# Altium PCB dv_analog_6_ch.PcbDoc (part 1 of 2)
Units mm, origin at the board's own origin, x right, y up, seen from the top; angles counter-clockwise.
Board outline 86.22 x 62.2 mm, 4 copper layers (Top Layer, GND, power, Bottom Layer), stack 1.781 mm thick; 215 components, 117 nets, 545 pads, 83 vias.
Unrouted connection lines stored in the file: 307.
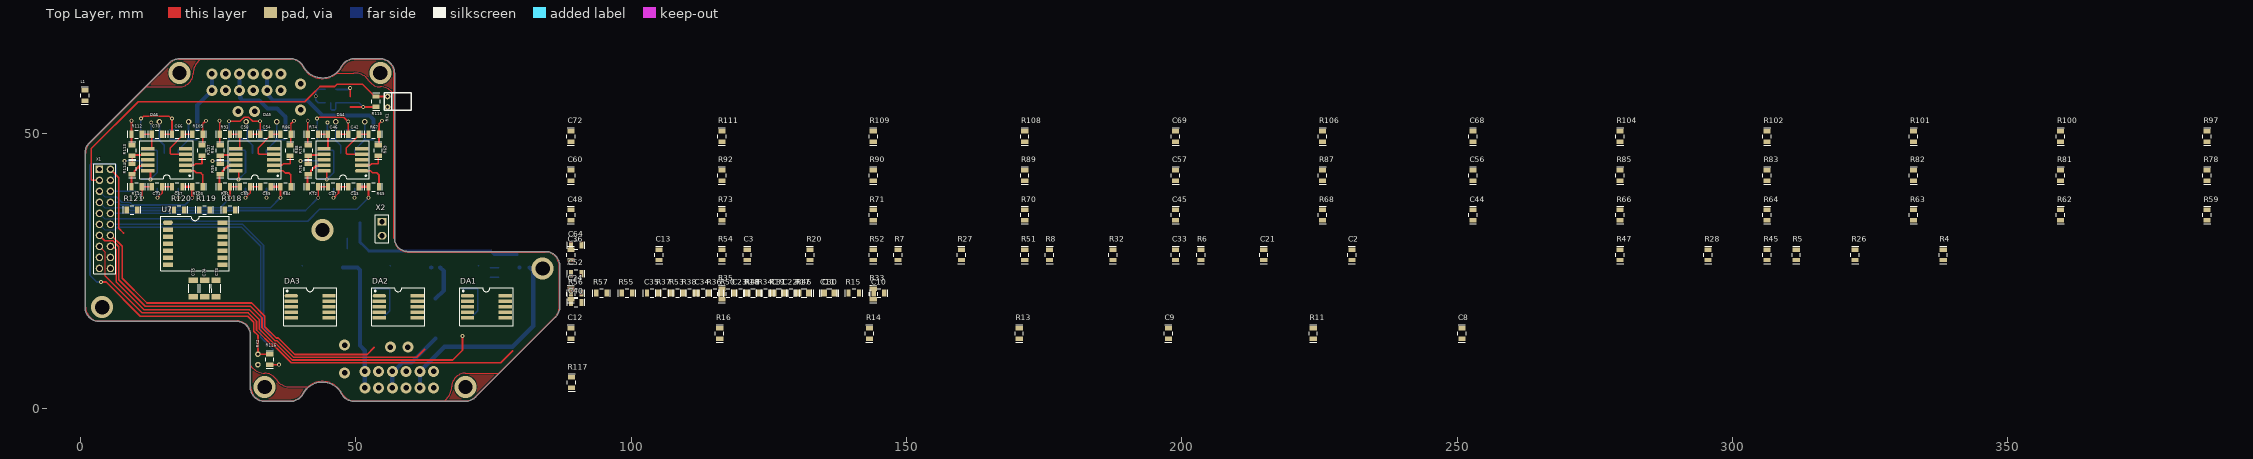
[diagram p0: Top Layer view]
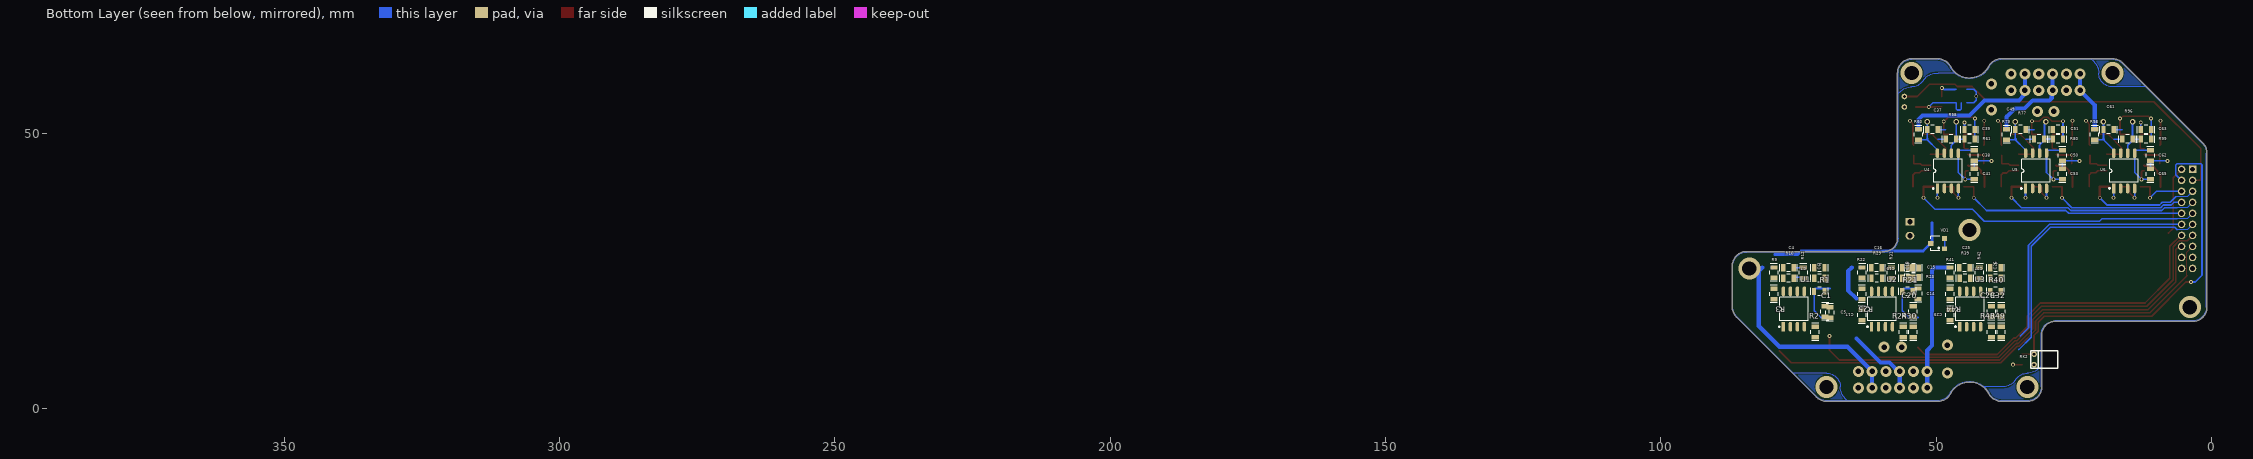
[diagram p1: Bottom Layer view, seen from below]
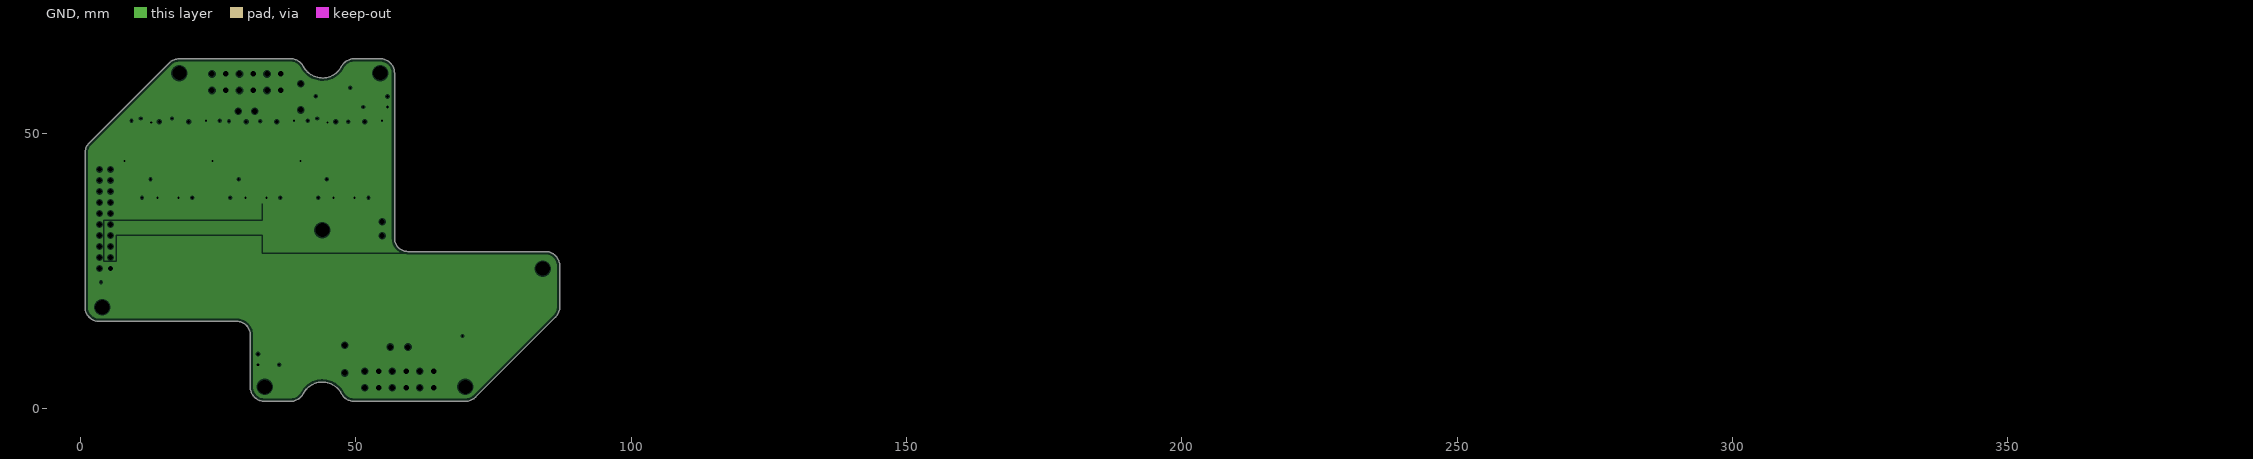
[diagram p2: GND, clearances drawn from the general rule]
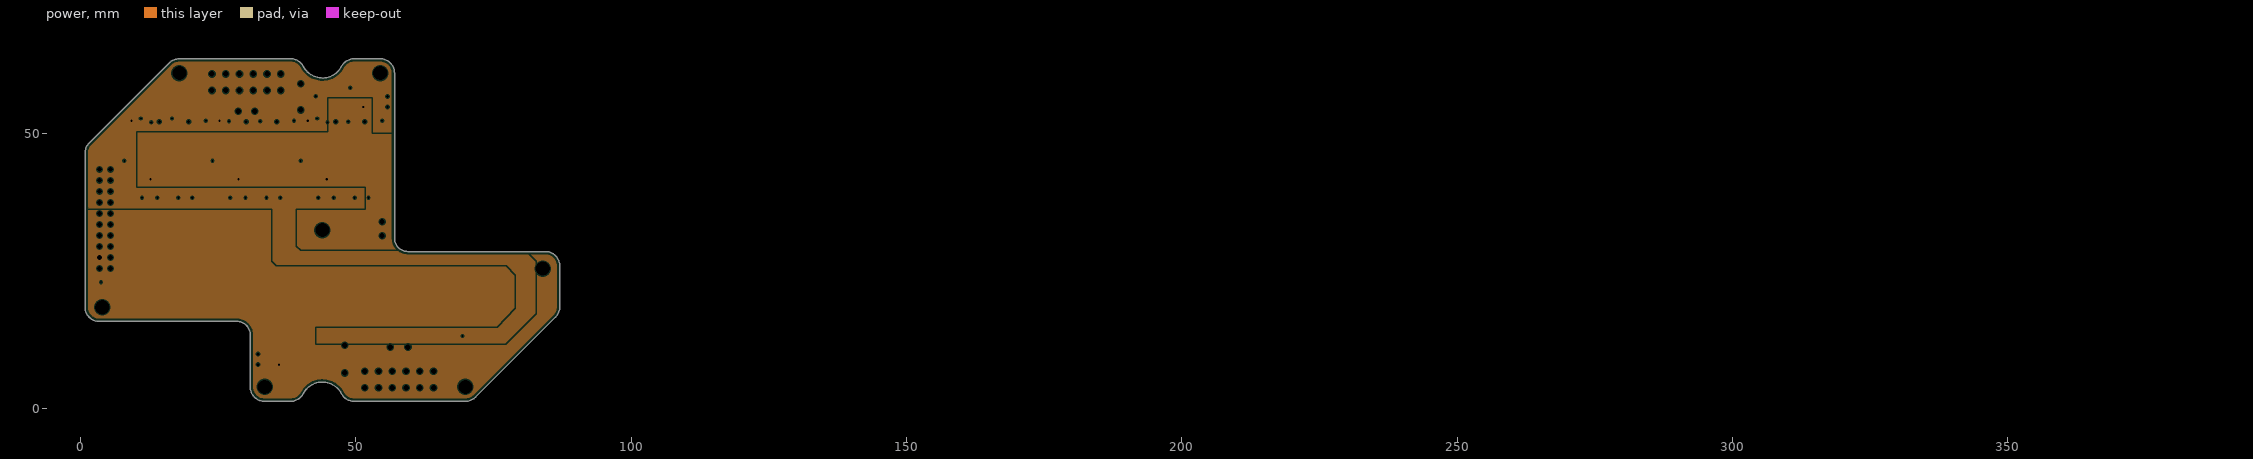
[diagram p3: power, clearances drawn from the general rule]

## Layer stack, top to bottom
Top Solder: solder mask 0.0254, SM-001, Dk 4
Top Layer: signal copper 0.035
Dielectric 2: prepreg 0.0711, PP-006, Dk 4.1
GND: plane copper 0.035, net GNDA
Dielectric 1: core 1.4986, Core-043, Dk 4.3
power: plane copper 0.035, net (Multiple Nets)
Dielectric 3: prepreg 0.0711, PP-006, Dk 4.1
Bottom Layer: signal copper 0.035
Bottom Solder: solder mask 0.0254, SM-001, Dk 4

## Board outline
3.451,15.847 28.451,15.847 cw(c28.451,13.447) 30.851,13.447 30.851,3.947 ccw(c33.451,3.947) 33.451,1.347 38.185,1.347 ccw(c38.185,3.947) 38.694,1.397 ccw(c38.2,3.95) 40.507,2.75 cw(c43.966,0.95) 43.219,4.777 cw(c43.951,0.947) 47.411,2.748 cw(c47.392,2.738) 47.411,2.747 ccw(c49.718,3.947) 49.718,1.347 69.916,1.347 ccw(c69.916,3.947) 70.426,1.397 ccw(c69.931,3.95) 71.769,2.11 ccw(c71.442,2.439) 71.77,2.111 86.305,16.647 ccw(c86.263,16.689) 86.306,16.648 ccw(c84.466,18.486) 87.067,18.486 ccw(c86.966,18.486) 87.052,18.538 87.052,25.947 ccw(c84.451,25.947) 84.451,28.547 59.451,28.547 cw(c59.451,30.947) 57.052,30.947 ccw(c56.951,30.947) 57.052,30.948 57.052,60.947 ccw(c54.451,60.947) 54.452,63.547 ccw(c54.452,62.897) 54.451,63.547 cw(c54.452,63.527) 54.452,63.547 54.451,63.547 49.718,63.547 ccw(c49.718,60.947) 47.411,62.147 ccw(c47.516,62.093) 47.411,62.147 ccw(c47.276,62.217) 47.411,62.147 cw(c43.951,63.947) 44.728,60.125 cw(c43.966,63.95) 40.507,62.15 ccw(c38.2,60.95) 38.202,63.55 ccw(c38.201,62.9) 38.2,63.55 cw(c38.201,63.485) 38.202,63.55 38.2,63.55 18.002,63.55 ccw(c18.002,63.48) 18,63.55 cw(c18.001,63.446) 18.002,63.55 18,63.55 ccw(c18.002,60.95) 17.493,63.5 ccw(c17.987,60.947) 16.148,62.786 1.613,48.25 ccw(c3.451,46.412) 0.851,46.412 ccw(c0.951,46.412) 0.851,46.411 0.851,18.447 ccw(c3.451,18.447)

## Design rules (kind name [scope] priority, off if disabled: settings)
Clearance [InNamedPolygon('NONET_L01_P004')] p1: gap=0.254 ignorepadtopadclearanceinfootprint=FALSE except(0: Arc-Hole Track-Hole SMDPad-Hole THPad-Hole Via-Hole Fill-Hole Poly-Hole Region-Hole Text-Hole)
Clearance "Clearance ALL" [All] p2: gap=0.2 ignorepadtopadclearanceinfootprint=TRUE
ComponentClearance [All] p1: gap=0.051 collisioncheckmode=3 verticalgap=0.051 showdistances=FALSE
DiffPairsRouting [InDifferentialPairClass('Diff Class')] p1: maxlimit=0.35 minlimit=0.25 mostfreqgap=0.25 toplayer_minwidth=0.25 toplayer_maxwidth=0.4 toplayer_prefwidth=0.3 bottomlayer_minwidth=0.25 bottomlayer_maxwidth=0.4 bottomlayer_prefwidth=0.3 maxuncoupledlength=12.7
HoleSize [All] p1: absolutevalues=TRUE maxlimit=3 minlimit=0.025 maxpercent=80.000 minpercent=20.000
MatchedLengths [InDifferentialPairClass('Diff Class')] p1: tolerance=0.5 checknetsindiffpair=TRUE checkdiffpairvsdiffpair=FALSE checkxsignals=FALSE checkothers=FALSE
PlaneClearance [All] p1: clearance=0.2
PlaneConnect [All] p1: planeconnectstyle=Relief reliefexpansion=0.508 reliefentries=4 reliefconductorwidth=0.4 reliefairgap=0.254
PolygonConnect [All] p1: connectstyle=Relief reliefconductorwidth=0.4 reliefentries=4 polygonreliefangle="90 Angle" airgapwidth=0.2
RoomDefinition dv_analog_main [InComponentClass('dv_analog_main')] p1: confinementstyle=ConfineIn formatcopy=TRUE lockcomponents=FALSE outline 88.1,3.1 109.6,3.1 109.6,10.6 88.1,10.6
RoomDefinition dv_analog_interface_ch6 [InComponentClass('dv_analog_interface_ch6')] p2: confinementstyle=ConfineIn formatcopy=TRUE lockcomponents=FALSE outline 7.7,37.5 23.7,37.5 23.7,53.1 7.7,53.1
RoomDefinition dv_analog_interface_ch1 [InComponentClass('dv_analog_interface_ch1')] p3: confinementstyle=ConfineIn formatcopy=TRUE lockcomponents=FALSE outline 65.9,12.4 81.9,12.4 81.9,28 65.9,28
RoomDefinition dv_analog_interface_ch4 [InComponentClass('dv_analog_interface_ch4')] p4: confinementstyle=ConfineIn formatcopy=TRUE lockcomponents=FALSE outline 39.7,37.5 55.7,37.5 55.7,53.1 39.7,53.1
RoomDefinition dv_analog_interface_ch5 [InComponentClass('dv_analog_interface_ch5')] p5: confinementstyle=ConfineIn formatcopy=TRUE lockcomponents=FALSE outline 23.7,37.5 39.7,37.5 39.7,53.1 23.7,53.1
RoomDefinition dv_analog_interface_ch3 [InComponentClass('dv_analog_interface_ch3')] p6: confinementstyle=ConfineIn formatcopy=TRUE lockcomponents=FALSE outline 33.9,12.4 49.9,12.4 49.9,28 33.9,28
RoomDefinition dv_analog_interface_ch2 [InComponentClass('dv_analog_interface_ch2')] p7: confinementstyle=ConfineIn formatcopy=TRUE lockcomponents=FALSE outline 49.9,12.4 65.9,12.4 65.9,28 49.9,28
RoutingVias [All] p1: holewidth=0.3 width=0.6 viastyle="Through Hole" minholewidth=0.3 minwidth=0.6 maxholewidth=1 maxwidth=3
SolderMaskExpansion [All] p1: expansion=0.102 istentingtop=FALSE
Width [All] p1: maxlimit=1 minlimit=0.2 preferedwidth=0.2 minimp=50.000000 maximp=50.000000 favimp=50.000000
25 further rules are at their usual default settings.

## Classes and differential pairs
channel class dv_analog_interface_ch: "All Components" "Bottom Side Components" dv_analog_interface_ch1 dv_analog_interface_ch2 dv_analog_interface_ch3 dv_analog_interface_ch4 dv_analog_interface_ch5 dv_analog_interface_ch6 "Inside Board Components" "Outside Board Components" "Top Side Components"
net class input[1..6]: input1 input2 input3 input4 input5 input6
net class data_2[1..6]: data_21 data_22 data_23 data_24 data_25 data_26
net class data_1[1..6]: data_11 data_12 data_13 data_14 data_15 data_16
component class dv_analog_main: C73 C74 C75 L1 R115 R116 R117 R118 R119 R120 R121 RK1 RK2 U7 VD1 X1 X2 X?
component class dv_analog_interface_ch5: C49 C50 C51 C52 C53 C54 C55 C56 C57 C58 C59 C60 C?_dv_analog_interface_ch6 DA5 DA?_dv_analog_interface_ch6 R77 R78 R79 R80 R81 R82 R83 R84 R85 R86 R87 R88 R89 R90 R91 R92 R93 R94 R95 R?_dv_analog_interface_ch6 U5
component class dv_analog_interface_ch4: C37 C38 C39 C40 C41 C42 C43 C44 C45 C46 C47 C48 C?_dv_analog_interface_ch5 DA4 DA?_dv_analog_interface_ch5 R58 R59 R60 R61 R62 R63 R64 R65 R66 R67 R68 R69 R70 R71 R72 R73 R74 R75 R76 R?_dv_analog_interface_ch5 U4
component class dv_analog_interface_ch3: C25 C26 C27 C28 C29 C30 C31 C32 C33 C34 C35 C36 DA3 R39 R40 R41 R42 R43 R44 R45 R46 R47 R48 R49 R50 R51 R52 R53 R54 R55 R56 R57 U3
component class dv_analog_interface_ch6: C61 C62 C63 C64 C65 C66 C67 C68 C69 C70 C71 C72 DA6 R96 R97 R98 R99 R100 R101 R102 R103 R104 R105 R106 R107 R108 R109 R110 R111 R112 R113 R114 U6
component class dv_analog_interface_ch2: C13 C14 C15 C16 C17 C18 C19 C20 C21 C22 C23 C24 DA2 R20 R21 R22 R23 R24 R25 R26 R27 R28 R29 R30 R31 R32 R33 R34 R35 R36 R37 R38 U2
component class dv_analog_interface_ch1: C1 C2 C3 C4 C5 C6 C7 C8 C9 C10 C11 C12 DA1 R1 R2 R3 R4 R5 R6 R7 R8 R9 R10 R11 R12 R13 R14 R15 R16 R17 R18 R19 U1

## Components (designator, comment, footprint, x,y, rotation, side; value= is the part's Value field where it differs from the comment)
C1 "K10-79" SMD_C0805 70.2,18.6 r270 bottom value=2.2нФ
C2 "K10-79" SMD_C0805 230.9,27 r90 top value="10 мкФ"
C3 "K10-79" SMD_C0805 121.1,27 r90 top value=150пФ
C4 "K10-79" SMD_C0805 77.8,25.6 r180 bottom value="10 мкФ" (schematic designator C15)
C5 "K10-79" SMD_C0805 69.312,18.454 r270 bottom value="10 мкФ" (schematic designator C4)
C6 "K10-79" SMD_C0805 70.3,23.7 r0 bottom value="0.1 мкФ" (schematic designator C5)
C7 "K10-79" SMD_C0805 70.3,25.6 r0 bottom value="1 нФ" (schematic designator C6)
C8 "K10-79" SMD_C0805 250.899,12.7 r90 top value="10 мкФ" (schematic designator C7)
C9 "K10-79" SMD_C0805 197.6,12.7 r90 top value="360 пФ" (schematic designator C8)
C10 "K10-79" SMD_C0805 144.1,21 r0 top value="0,1 мкФ" (schematic designator C9)
C11 "K10-79" SMD_C0805 134.9,21 r0 top value="1 нФ" (schematic designator C10)
C12 "K10-79" SMD_C0805 89.1,12.7 r90 top value="10 пФ" (schematic designator C11)
C13 "K10-79" SMD_C0805 105.1,27 r90 top value=2.2нФ (schematic designator C1)
C14 "K10-79" SMD_C0805 53.312,19.925 r90 bottom value="10 мкФ" (schematic designator C2)
C15 "K10-79" SMD_C0805 55.09,25.575 r180 bottom value=150пФ (schematic designator C3)
C16 "K10-79" SMD_C0805 61.8,25.6 r180 bottom value="10 мкФ" (schematic designator C15)
C17 "K10-79" SMD_C0805 63.5,16.1 r90 bottom value="10 мкФ" (schematic designator C4)
C18 "K10-79" SMD_C0805 54.3,23.7 r0 bottom value="0.1 мкФ" (schematic designator C5)
C19 "K10-79" SMD_C0805 54.3,25.6 r0 bottom value="1 нФ" (schematic designator C6)
C20 "K10-79" SMD_C0805 54.2,18.6 r270 bottom value="10 мкФ" (schematic designator C7)
C21 "K10-79" SMD_C0805 214.9,27 r90 top value="360 пФ" (schematic designator C8)
C22 "K10-79" SMD_C0805 128.1,21 r0 top value="0,1 мкФ" (schematic designator C9)
C23 "K10-79" SMD_C0805 118.9,21 r0 top value="1 нФ" (schematic designator C10)
C24 "K10-79" SMD_C0805 89.1,19.9 r90 top value="10 пФ" (schematic designator C11)
C25 "K10-79" SMD_C0805 45.8,25.6 r180 bottom value=2.2нФ (schematic designator C1)
C26 "K10-79" SMD_C0805 38.3,23.7 r0 bottom value="10 мкФ" (schematic designator C2)
C27 "K10-79" SMD_C0805 38.3,25.6 r0 bottom value=150пФ (schematic designator C3)
C28 "K10-79" SMD_C0805 40,16.7 r90 bottom value="10 мкФ" (schematic designator C15)
C29 "K10-79" SMD_C0805 47.5,16.1 r90 bottom value="10 мкФ" (schematic designator C4)
C30 "K10-79" SMD_C0805 135.2,21 r0 top value="0.1 мкФ" (schematic designator C5)
C31 "K10-79" SMD_C0805 126,21 r0 top value="1 нФ" (schematic designator C6)
C32 "K10-79" SMD_C0805 38.2,18.6 r270 bottom value="10 мкФ" (schematic designator C7)
C33 "K10-79" SMD_C0805 198.9,27 r90 top value="360 пФ" (schematic designator C8)
C34 "K10-79" SMD_C0805 112.1,21 r0 top value="0,1 мкФ" (schematic designator C9)
C35 "K10-79" SMD_C0805 102.9,21 r0 top value="1 нФ" (schematic designator C10)
C36 "K10-79" SMD_C0805 89.1,27 r90 top value="10 пФ" (schematic designator C11)
C37 "K10-79" SMD_C0805 51.643,50.675 r180 bottom value=2.2нФ (schematic designator C1)
C38 "K10-79" SMD_C0805 43.112,45.025 r90 bottom value="10 мкФ" (schematic designator C2)
C39 "K10-79" SMD_C0805 44.89,50.675 r180 bottom value=150пФ (schematic designator C3)
C40 "K10-79" SMD_C0805 89.1,19.3 r0 top value="10 мкФ" (schematic designator C15)
C41 "K10-79" SMD_C0805 43.112,43.554 r270 bottom value="10 мкФ" (schematic designator C4)
C42 "K10-79" SMD_C0805 50.548,49.85 r180 top value="0.1 мкФ" (schematic designator C5)
C43 "K10-79" SMD_C0805 48.643,40.297 r0 top value="1 нФ" (schematic designator C6)
C44 "K10-79" SMD_C0805 252.899,34.2 r90 top value="10 мкФ" (schematic designator C7)
C45 "K10-79" SMD_C0805 198.9,34.2 r90 top value="360 пФ" (schematic designator C8)
C46 "K10-79" SMD_C0805 44.964,49.85 r0 top value="0,1 мкФ" (schematic designator C9)
C47 "K10-79" SMD_C0805 46.869,40.297 r180 top value="1 нФ" (schematic designator C10)
C48 "K10-79" SMD_C0805 89.1,34.2 r90 top value="10 пФ" (schematic designator C11)
C49 "K10-79" SMD_C0805 35.643,50.675 r180 bottom value=2.2нФ (schematic designator C1)
C50 "K10-79" SMD_C0805 27.112,45.025 r90 bottom value="10 мкФ" (schematic designator C2)
C51 "K10-79" SMD_C0805 28.89,50.675 r180 bottom value=150пФ (schematic designator C3)
C52 "K10-79" SMD_C0805 89.1,24.5 r0 top value="10 мкФ" (schematic designator C15)
C53 "K10-79" SMD_C0805 27.112,43.554 r270 bottom value="10 мкФ" (schematic designator C4)
C54 "K10-79" SMD_C0805 34.548,49.85 r180 top value="0.1 мкФ" (schematic designator C5)
C55 "K10-79" SMD_C0805 32.643,40.297 r0 top value="1 нФ" (schematic designator C6)
C56 "K10-79" SMD_C0805 252.899,41.4 r90 top value="10 мкФ" (schematic designator C7)
C57 "K10-79" SMD_C0805 198.9,41.4 r90 top value="360 пФ" (schematic designator C8)
C58 "K10-79" SMD_C0805 28.964,49.85 r0 top value="0,1 мкФ" (schematic designator C9)
C59 "K10-79" SMD_C0805 30.869,40.297 r180 top value="1 нФ" (schematic designator C10)
C60 "K10-79" SMD_C0805 89.1,41.4 r90 top value="10 пФ" (schematic designator C11)
C61 "K10-79" SMD_C0805 19.643,50.675 r180 bottom value=2.2нФ (schematic designator C1)
C62 "K10-79" SMD_C0805 11.112,45.025 r90 bottom value="10 мкФ" (schematic designator C2)
C63 "K10-79" SMD_C0805 12.89,50.675 r180 bottom value=150пФ (schematic designator C3)
C64 "K10-79" SMD_C0805 89.1,29.7 r0 top value="10 мкФ" (schematic designator C15)
C65 "K10-79" SMD_C0805 11.112,43.554 r270 bottom value="10 мкФ" (schematic designator C4)
C66 "K10-79" SMD_C0805 18.548,49.85 r180 top value="0.1 мкФ" (schematic designator C5)
C67 "K10-79" SMD_C0805 16.643,40.297 r0 top value="1 нФ" (schematic designator C6)
C68 "K10-79" SMD_C0805 252.899,48.5 r90 top value="10 мкФ" (schematic designator C7)
C69 "K10-79" SMD_C0805 198.9,48.5 r90 top value="360 пФ" (schematic designator C8)
C70 "K10-79" SMD_C0805 12.964,49.85 r0 top value="0,1 мкФ" (schematic designator C9)
C71 "K10-79" SMD_C0805 14.869,40.297 r180 top value="1 нФ" (schematic designator C10)
C72 "K10-79" SMD_C0805 89.1,48.5 r90 top value="10 пФ" (schematic designator C11)
C73 "K10-79" SMD_C1206 24.632,23.325 r270 top value=22мкФ (schematic designator C12)
C74 "K10-79" SMD_C1206 22.57,23.325 r270 top value=22мкФ (schematic designator C13)
C75 "K10-79" SMD_C1206 20.508,23.325 r270 top value=22мкФ (schematic designator C14)
DA1 "1487UD2U" HO2.8-1B 70.3,20.5 r0 top
DA2 "1487UD2U" HO2.8-1B 54.3,20.5 r0 top (schematic designator DA1)
DA3 "1487UD2U" HO2.8-1B 38.3,20.5 r0 top (schematic designator DA1)
DA4 "1487UD2U" HO2.8-1B 51.1,43.2 r180 top (schematic designator DA1)
DA5 "1487UD2U" HO2.8-1B 35.1,43.2 r180 top (schematic designator DA1)
DA6 "1487UD2U" HO2.8-1B 19.1,43.2 r180 top (schematic designator DA1)
L1 "Inductor" SMD_0805 0.837,57.8 r270 top value=1мкГн
R1 "OSM R1-12" SMD_0805 72.205,21.3 r180 bottom value=10M
R2 "OSM R1-12" SMD_0805 72,13 r90 bottom value=330
R3 "OSM R1-12" SMD_0805 79.5,19.9 r90 bottom value=10k
R4 "OSM R1-12" SMD_0805 338.299,27 r90 top value=51k
R5 "OSM R1-12" SMD_0805 311.599,27 r90 top value=330
R6 "OSM R1-12" SMD_0805 203.5,27 r90 top value=27
R7 "OSM R1-12" SMD_0805 148.5,27 r90 top value=10k
R8 "OSM R1-12" SMD_0805 176,27 r90 top value=13k
R9 "OSM R1-12" SMD_0805 79.495,25.65 r270 bottom value=51k
R10 "OSM R1-12" SMD_0805 77.77,23.7 r180 bottom value=200к
R11 "OSM R1-12" SMD_0805 223.9,12.7 r90 top value=27
R12 "OSM R1-12" SMD_0805 74.154,23.745 r90 bottom value=10k
R13 "OSM R1-12" SMD_0805 170.5,12.7 r90 top value=110k
R14 "OSM R1-12" SMD_0805 143.3,12.7 r90 top value=10k
R15 "OSM R1-12" SMD_0805 139.5,21 r0 top value=13k
R16 "OSM R1-12" SMD_0805 116.1,12.7 r90 top value=51k
R17 "OSM R1-12" SMD_0805 130.3,21 r0 top value=200к
R18 "OSM R1-12" SMD_0805 121.1,21 r0 top value=330
R19 "OSM R1-12" SMD_0805 125.7,21 r0 top value=1M
R20 "OSM R1-12" SMD_0805 132.5,27 r90 top value=10M (schematic designator R1)
R21 "OSM R1-12" SMD_0805 56.205,21.3 r180 bottom value=330 (schematic designator R2)
R22 "OSM R1-12" SMD_0805 63.495,25.65 r270 bottom value=10k (schematic designator R3)
R23 "OSM R1-12" SMD_0805 55.09,23.85 r180 bottom value=51k (schematic designator R4)
R24 "OSM R1-12" SMD_0805 56,13 r90 bottom value=330 (schematic designator R5)
R25 "OSM R1-12" SMD_0805 63.5,19.9 r90 bottom value=27 (schematic designator R6)
R26 "OSM R1-12" SMD_0805 322.299,27 r90 top value=10k (schematic designator R7)
R27 "OSM R1-12" SMD_0805 160,27 r90 top value=13k (schematic designator R8)
R28 "OSM R1-12" SMD_0805 295.599,27 r90 top value=51k (schematic designator R9)
R29 "OSM R1-12" SMD_0805 61.77,23.7 r180 bottom value=200к (schematic designator R10)
R30 "OSM R1-12" SMD_0805 54.2,13 r90 bottom value=27 (schematic designator R11)
R31 "OSM R1-12" SMD_0805 58.154,23.745 r90 bottom value=10k (schematic designator R12)
R32 "OSM R1-12" SMD_0805 187.5,27 r90 top value=110k (schematic designator R13)
R33 "OSM R1-12" SMD_0805 144,19.9 r90 top value=10k (schematic designator R14)
R34 "OSM R1-12" SMD_0805 123.5,21 r0 top value=13k (schematic designator R15)
R35 "OSM R1-12" SMD_0805 116.5,19.9 r90 top value=51k (schematic designator R16)
R36 "OSM R1-12" SMD_0805 114.3,21 r0 top value=200к (schematic designator R17)
R37 "OSM R1-12" SMD_0805 105.1,21 r0 top value=330 (schematic designator R18)
R38 "OSM R1-12" SMD_0805 109.7,21 r0 top value=1M (schematic designator R19)
R39 "OSM R1-12" SMD_0805 45.77,23.7 r180 bottom value=10M (schematic designator R1)
R40 "OSM R1-12" SMD_0805 40.205,21.3 r180 bottom value=330 (schematic designator R2)
R41 "OSM R1-12" SMD_0805 47.495,25.65 r270 bottom value=10k (schematic designator R3)
R42 "OSM R1-12" SMD_0805 42.154,23.745 r90 bottom value=51k (schematic designator R4)
R43 "OSM R1-12" SMD_0805 40,13 r90 bottom value=330 (schematic designator R5)
R44 "OSM R1-12" SMD_0805 47.5,19.9 r90 bottom value=27 (schematic designator R6)
R45 "OSM R1-12" SMD_0805 306.299,27 r90 top value=10k (schematic designator R7)
R46 "OSM R1-12" SMD_0805 130.6,21 r0 top value=13k (schematic designator R8)
R47 "OSM R1-12" SMD_0805 279.599,27 r90 top value=51k (schematic designator R9)
R48 "OSM R1-12" SMD_0805 121.3,21 r0 top value=200к (schematic designator R10)
R49 "OSM R1-12" SMD_0805 38.2,13 r90 bottom value=27 (schematic designator R11)
R50 "OSM R1-12" SMD_0805 116.7,21 r0 top value=10k (schematic designator R12)
R51 "OSM R1-12" SMD_0805 171.5,27 r90 top value=110k (schematic designator R13)
R52 "OSM R1-12" SMD_0805 144,27 r90 top value=10k (schematic designator R14)
R53 "OSM R1-12" SMD_0805 107.5,21 r0 top value=13k (schematic designator R15)
R54 "OSM R1-12" SMD_0805 116.5,27 r90 top value=51k (schematic designator R16)
R55 "OSM R1-12" SMD_0805 98.3,21 r0 top value=200к (schematic designator R17)
R56 "OSM R1-12" SMD_0805 89.1,21 r0 top value=330 (schematic designator R18)
R57 "OSM R1-12" SMD_0805 93.7,21 r0 top value=1M (schematic designator R19)
R58 "OSM R1-12" SMD_0805 48.266,48.95 r180 bottom value=10M (schematic designator R1)
R59 "OSM R1-12" SMD_0805 386.199,34.2 r90 top value=330 (schematic designator R2)
R60 "OSM R1-12" SMD_0805 53.241,50.75 r270 bottom value=10k (schematic designator R3)
R61 "OSM R1-12" SMD_0805 44.89,48.95 r180 bottom value=51k (schematic designator R4)
R62 "OSM R1-12" SMD_0805 359.599,34.2 r90 top value=330 (schematic designator R5)
R63 "OSM R1-12" SMD_0805 332.899,34.2 r90 top value=27 (schematic designator R6)
R64 "OSM R1-12" SMD_0805 306.299,34.2 r90 top value=10k (schematic designator R7)
R65 "OSM R1-12" SMD_0805 54.227,40.297 r180 top value=13k (schematic designator R8)
R66 "OSM R1-12" SMD_0805 279.599,34.2 r90 top value=51k (schematic designator R9)
R67 "OSM R1-12" SMD_0805 54.227,49.85 r180 top value=200к (schematic designator R10)
R68 "OSM R1-12" SMD_0805 225.6,34.2 r90 top value=27 (schematic designator R11)
R69 "OSM R1-12" SMD_0805 54.1,45.971 r90 top value=10k (schematic designator R12)
R70 "OSM R1-12" SMD_0805 171.5,34.2 r90 top value=110k (schematic designator R13)
R71 "OSM R1-12" SMD_0805 144,34.2 r90 top value=10k (schematic designator R14)
R72 "OSM R1-12" SMD_0805 41.286,40.297 r0 top value=13k (schematic designator R15)
R73 "OSM R1-12" SMD_0805 116.5,34.2 r90 top value=51k (schematic designator R16)
R74 "OSM R1-12" SMD_0805 41.286,49.85 r0 top value=200к (schematic designator R17)
R75 "OSM R1-12" SMD_0805 41.4,45.971 r90 top value=330 (schematic designator R18)
R76 "OSM R1-12" SMD_0805 41.4,44.5 r270 top value=1M (schematic designator R19)
R77 "OSM R1-12" SMD_0805 32.266,48.95 r180 bottom value=10M (schematic designator R1)
R78 "OSM R1-12" SMD_0805 386.199,41.4 r90 top value=330 (schematic designator R2)
R79 "OSM R1-12" SMD_0805 37.241,50.75 r270 bottom value=10k (schematic designator R3)
R80 "OSM R1-12" SMD_0805 28.89,48.95 r180 bottom value=51k (schematic designator R4)
R81 "OSM R1-12" SMD_0805 359.599,41.4 r90 top value=330 (schematic designator R5)
R82 "OSM R1-12" SMD_0805 332.899,41.4 r90 top value=27 (schematic designator R6)
R83 "OSM R1-12" SMD_0805 306.299,41.4 r90 top value=10k (schematic designator R7)
R84 "OSM R1-12" SMD_0805 38.227,40.297 r180 top value=13k (schematic designator R8)
R85 "OSM R1-12" SMD_0805 279.599,41.4 r90 top value=51k (schematic designator R9)
R86 "OSM R1-12" SMD_0805 38.227,49.85 r180 top value=200к (schematic designator R10)
R87 "OSM R1-12" SMD_0805 225.6,41.4 r90 top value=27 (schematic designator R11)
R88 "OSM R1-12" SMD_0805 38.1,45.971 r90 top value=10k (schematic designator R12)
R89 "OSM R1-12" SMD_0805 171.5,41.4 r90 top value=110k (schematic designator R13)
R90 "OSM R1-12" SMD_0805 144,41.4 r90 top value=10k (schematic designator R14)
R91 "OSM R1-12" SMD_0805 25.286,40.297 r0 top value=13k (schematic designator R15)
R92 "OSM R1-12" SMD_0805 116.5,41.4 r90 top value=51k (schematic designator R16)
R93 "OSM R1-12" SMD_0805 25.286,49.85 r0 top value=200к (schematic designator R17)
R94 "OSM R1-12" SMD_0805 25.4,45.971 r90 top value=330 (schematic designator R18)
R95 "OSM R1-12" SMD_0805 25.4,44.5 r270 top value=1M (schematic designator R19)
R96 "OSM R1-12" SMD_0805 16.266,48.95 r180 bottom value=10M (schematic designator R1)
R97 "OSM R1-12" SMD_0805 386.199,48.5 r90 top value=330 (schematic designator R2)
R98 "OSM R1-12" SMD_0805 21.241,50.75 r270 bottom value=10k (schematic designator R3)
R99 "OSM R1-12" SMD_0805 12.89,48.95 r180 bottom value=51k (schematic designator R4)
R100 "OSM R1-12" SMD_0805 359.599,48.5 r90 top value=330 (schematic designator R5)
R101 "OSM R1-12" SMD_0805 332.899,48.5 r90 top value=27 (schematic designator R6)
R102 "OSM R1-12" SMD_0805 306.299,48.5 r90 top value=10k (schematic designator R7)
R103 "OSM R1-12" SMD_0805 22.227,40.297 r180 top value=13k (schematic designator R8)
R104 "OSM R1-12" SMD_0805 279.599,48.5 r90 top value=51k (schematic designator R9)
R105 "OSM R1-12" SMD_0805 22.227,49.85 r180 top value=200к (schematic designator R10)
R106 "OSM R1-12" SMD_0805 225.6,48.5 r90 top value=27 (schematic designator R11)
R107 "OSM R1-12" SMD_0805 22.1,45.971 r90 top value=10k (schematic designator R12)
R108 "OSM R1-12" SMD_0805 171.5,48.5 r90 top value=110k (schematic designator R13)
R109 "OSM R1-12" SMD_0805 144,48.5 r90 top value=10k (schematic designator R14)
R110 "OSM R1-12" SMD_0805 9.286,40.297 r0 top value=13k (schematic designator R15)
R111 "OSM R1-12" SMD_0805 116.5,48.5 r90 top value=51k (schematic designator R16)
R112 "OSM R1-12" SMD_0805 9.286,49.85 r0 top value=200к (schematic designator R17)
R113 "OSM R1-12" SMD_0805 9.4,45.971 r90 top value=330 (schematic designator R18)
R114 "OSM R1-12" SMD_0805 9.4,44.5 r270 top value=1M (schematic designator R19)
R115 "OSM R1-12" SMD_0805 53.7,56.7 r270 top value=1k (schematic designator R20)
R116 "OSM R1-12" SMD_0805 34.4,9.9 r270 top value=1k (schematic designator R21)
R117 "OSM R1-12" SMD_0805 89.2,3.8 r90 top value=3k3 (schematic designator R22)
R118 "OSM R1-12" SMD_0805 26.2,36.1 r0 top value=30k (schematic designator R23)
R119 "OSM R1-12" SMD_0805 21.6,36.1 r0 top value=1k (schematic designator R24)
R120 "OSM R1-12" SMD_0805 17,36.1 r0 top value=2k (schematic designator R25)
R121 "OSM R1-12" SMD_0805 8.4,36.1 r0 top value=8.2 (schematic designator R26)
RK1 "Pt1000" Pt1000_3.0x1.0 55.8,56.7 r270 top value=1000
RK2 "Pt1000" Pt1000_3.0x1.0 32.25,9.905 r270 bottom value=1000
U1 "ADA4530" SOIC-8 77.77,14.9 r90 bottom
U2 "ADA4530" SOIC-8 61.77,14.9 r90 bottom (schematic designator U1)
U3 "ADA4530" SOIC-8 45.77,14.9 r90 bottom (schematic designator U1)
U4 "ADA4530" SOIC-8 49.8,40 r90 bottom (schematic designator U1)
U5 "ADA4530" SOIC-8 33.8,40 r90 bottom (schematic designator U1)
U6 "ADA4530" SOIC-8 17.8,40 r90 bottom (schematic designator U1)
U7 "2ТС622А1 OC" "14PIN FLATPACK" 13.741,34.923 r0 top (schematic designator U2)
VD1 "BAV70" SOT-23 48.5,29.05 r0 bottom
X1 "Header 2X20" PLD2-20 3.466,43.468 r0 top locked
X2 "Jumper 2" PLS-2 54.8,33.94 r270 top

## Footprints (in the part's own frame and the unit in brackets; to place one, negate y for a bottom-side part, rotate by r counter-clockwise, add the part's x,y. Pads: shape width x height; smd on the part's side, far side on the other; paste and mask are expansions set on the pad)
"14PIN FLATPACK" [mil]
  oval 70x32 smd: 1(85,-45)
  rect 70x32 smd: 2(85,-95) 3(85,-145) 4(85,-195) 5(85,-245) 6(85,-295) 7(85,-345) 8(475,-345) 9(475,-295) 10(475,-245) 11(475,-195) 12(475,-145) 13(475,-95) 14(475,-45)
  silkscreen extent 35,-390 525,0, body extent 150,-390 410,0, height 90
HO2.8-1B [mil]
  rect 95x25 smd: 0(0,-78.74) 0(270,-78.74) 2(0,-39.37) 3(0,-118.11) 4(0,-157.48) 5(270,-157.48) 6(270,-118.11) 7(270,-39.37) 8(270,0)
  oval 95x25 smd: 1(0,0)
  silkscreen extent -55,-214 326,56, body extent -30,-207 305,49, height 114
PLD2-20 [mil]
  rect 54x54 hole 34: 1(0,0)
  round 54 hole 34: 2(78.74,0) 3(0,-78.74) 4(78.74,-78.74) 5(0,-157.48) 6(78.74,-157.48) 7(0,-236.22) 8(78.74,-236.22) 9(0,-314.96) 10(78.74,-314.96) 11(0,-393.7) 12(78.74,-393.7) 13(0,-472.44) 14(78.74,-472.44) 15(0,-551.18) 16(78.74,-551.18) 17(0,-629.92) 18(78.74,-629.92) 19(0,-708.66) 20(78.74,-708.66)
  silkscreen extent -39,-748 118,39, body extent -39,-744 118,35, height 232
PLS-2 [mm] "2.54mm PIN HEADER R/A"
  rect 1.4x1.6 hole 0.95: 1(0,0)
  oval 1.4x1.6 hole 0.95: 2(2.54,0)
  silkscreen extent -1.27,-1.25 3.81,1.25, body extent -1.27,-1.27 3.81,1.27, height 7.83
Pt1000_3.0x1.0 [mil]
  round 40 hole 20: 1(0,0) 2(75,0)
  silkscreen extent -25,-25 100,170, body extent 17,40 57,159, height 40
SMD_0805 [mm]
  rect 0.8x1.3 smd: 1(0,0) 2(1.9,0)
  silkscreen extent -0.64,-0.76 2.54,0.76, body extent -0.05,-0.62 1.95,0.63, height 0.43
SMD_C0805 [mm]
  rect 0.8x1.3 smd: 1(0,0) 2(1.9,0)
  silkscreen extent -0.64,-0.76 2.54,0.76, body extent -0.1,-0.72 2,0.73, height 1.35
SMD_C1206 [mm]
  rect 1x1.7 smd: 1(0,0) 2(3,0)
  silkscreen extent 0.7,-0.91 2.3,0.9, body extent -0.25,-0.95 3.25,0.95, height 1.9
SOIC-8 [mil]
  rect 70x23.62 smd: 1(0,0)
  oval 70x25 smd: 2(0,-50) 3(0,-100) 4(0,-150) 5(251.97,-150) 6(251.97,-100) 7(251.97,-50) 8(251.97,0)
  silkscreen extent -5,-177 209,34, body extent 4,-173 248,24, height 69
SOT-23 [mm]
  rrect50% 0.95x0.9 smd: 1(0,0)
  rect 0.95x0.9 smd: 2(0,-1.9) 3(2.5,-0.95)
  silkscreen extent 0.87,-2.25 2.5,0.35, body extent 0,-2.45 2.5,0.55, height 1.08

## Part data
C1 C2 C3 C4 C5 C6 C7 C8 C9 C10 C11 C12 C13 C14 C15 C16 C17 C18 C19 C20 C21 C22 C23 C24 C25 C26 C27 C28 C29 C30 C31 C32 C33 C34 C35 C36 C37 C38 C39 C40 C41 C42 C43 C44 C45 C46 C47 C48 C49 C50 C51 C52 C53 C54 C55 C56 C57 C58 C59 C60 C61 C62 C63 C64 C65 C66 C67 C68 C69 C70 C71 C72 C73 C74 C75: library part Capacitor, "Capacitor", Назначение=SMD-конденсатор, Наименование=К10-79, Напряжение=В, Потребление, Вт=0, Точность=%
DA1 DA2 DA3 DA4 DA5 DA6: "Сдвоенный операционный усилитель", Назначение="Сдвоенный операционный усилитель", Наименование="1487УД2У \"ВП\"", Потребление, Вт=0,01
R1 R2 R3 R4 R5 R6 R7 R8 R9 R10 R11 R12 R13 R14 R15 R16 R17 R18 R19 R20 R21 R22 R23 R24 R25 R26 R27 R28 R29 R30 R31 R32 R33 R34 R35 R36 R37 R38 R39 R40 R41 R42 R43 R44 R45 R46 R47 R48 R49 R50 R51 R52 R53 R54 R55 R56 R57 R58 R59 R60 R61 R62 R63 R64 R65 R66 R67 R68 R69 R70 R71 R72 R73 R74 R75 R76 R77 R78 R79 R80 R81 R82 R83 R84 R85 R86 R87 R88 R89 R90 R91 R92 R93 R94 R95 R96 R97 R98 R99 R100 R101 R102 R103 R104 R105 R106 R107 R108 R109 R110 R111 R112 R113 R114 R115 R116 R117 R118 R119 R120 R121: library part Resistor, "Resistor", Назначение=SMD-резистор, Наименование="ОСМ Р1-12", Потребление, Вт=0,001, Точность=%
RK1 RK2: "Платиновый термометр сопротивления", ComponentLink1Description=DataSheet, ComponentLink1URL=https://ru.mouser.com/datasheet/2/619/M310_HST-USA-1131966.pdf, Назначение="Термометр сопротивления", Наименование=Pt1000, Потребление, Вт=0,001
U1 U2 U3 U4 U5 U6: "Ultra-Low Bias Current Difet OpAmp", Назначение="Операционный усилитель", Наименование=ADA4530, Потребление, Вт=0,005
U7: library part "2TS622A1 OS", Назначение="Матрица транзисторная", Наименование="2ТС622А1 OC"
X1: "Header, 20-Pin, Dual row", Назначение="Header, 20-Pin, Dual row", Наименование=PLD2-20, Потребление, Вт=0,0
X2: "Jumper, 2-Pin, Dual row", Назначение="Jumper, 2-Pin, Dual row", Наименование="Jumper 2-pin", Потребление, Вт=0,0
L1: Назначение=SMD-индуктивность, Наименование=Индуктивность, Потребление, Вт=0,010
VD1: ComponentLink1Description=DataSheet, ComponentLink1URL=https://static.chipdip.ru/lib/635/DOC005635893.pdf, Назначение="Диодная сборка", Наименование=BAV70

## Via types
v1: diameter 0.7, hole 0.4, Top Layer to Bottom Layer, 38 vias
v2: diameter 2, hole 1, Top Layer to Bottom Layer, 32 vias
v3: diameter 4, hole 2.6, Top Layer to Bottom Layer, 7 vias
v4: diameter 1, hole 0.6, Top Layer to Bottom Layer, 6 vias

## Nets (pads, with @x,y where several pads share a name; then routed paths per layer and width w, separated by ;. In a path a pad name is that pad's centre, name@x,y a point inside that pad or via, vN(x,y) a via of type N, cw(c..) or ccw(c..) an arc to the next point about the centre after c; other vN are vias at no path point)
+3.3V: R117.2 X1.19
+3.3V_dv_analog_interface_ch1: R7.2 R14.2 R26.2 R33.2 R45.2 R52.2 R64.2 R71.2 R83.2 R90.2 R102.2 R109.2
+5V: R2.2 R6.2 R21.2 R25.2 R40.2 R44.2 R59.2 R63.2 R78.2 R82.2 R97.2 R101.2 R115.2 R116.2 X1.17 | length 71.9
  Top Layer w0.3: 12.242,43.2 12.577,43.2 12.744,43.033 v1(12.744,41.654) ; 28.242,43.2 28.577,43.2 28.744,43.033 v1(28.744,41.654) ; R116.2@34.4,8 v1(36.1,8) ; 44.242,43.2 44.577,43.2 44.744,43.033 v1(44.744,41.654) ; 49,54.8 49.009,54.791 51.355,54.791 v1(51.364,54.782) 51.373,54.791 53.691,54.791 R115.2@53.7,54.8
  Bottom Layer w0.3: 11.112,41.654 v1(12.744,41.654) 13.99,42.9 13.99,46.4 13.99,46.77 13.835,46.925 11.112,46.925 ; 27.112,41.654 v1(28.744,41.654) 29.99,42.9 29.99,46.4 29.99,46.77 29.835,46.925 27.112,46.925 ; 43.112,41.654 v1(44.744,41.654) 45.99,42.9 45.99,46.4 45.99,46.77 45.835,46.925 43.112,46.925 ; 45.45,55.55 45.45,54.426 45.626,54.25 46.224,54.25 46.4,54.426 46.4,55.55 50.596,55.55 v1(51.364,54.782) ; 53.312,16.554 54.944,16.554 56.19,17.8 56.19,21.3 56.19,21.67 56.035,21.825 53.312,21.825 ; 69.312,16.554 70.944,16.554 ; 69.312,21.825 72.035,21.825 72.19,21.67 72.19,21.3 72.19,17.8 70.944,16.554
-5V: R5.1 R11.1 R24.1 R30.1 R43.1 R49.1 R62.1 R68.1 R81.1 R87.1 R100.1 R106.1 R120.1 R121.2 X1.1
data_11: C7.2 R7.1 R8.2 R9.2 X1.15 | length 88.2
  Top Layer w0.2: X1.15@3.466,29.468 4.48,28.454 4.48,24.12
  Top Layer w0.3: 4.48,24.12 11.2,17.4 30.5,17.4 30.6,17.3 30.607,17.3 32,15.907 32,14.279 34.929,11.35 35.291,11.35 38.291,8.35 76.35,8.35 78.527,10.527
  Bottom Layer w0.3: C7.2@72.295,25.97 C7.2@72.3,25.975
data_12: C19.2 R26.1 R27.2 R28.2 X1.13 | length 73.4
  Top Layer w0.3: X1.13@3.466,31.468 4.458,30.476 5.923,30.476 7.002,29.397 7.002,23.398 11.8,18.6 30.9,18.6 33,16.5 33,14.693 35.343,12.35 35.706,12.35 38.706,9.35 61.1,9.35 62.527,10.777
  Bottom Layer w0.3: C19.2@56.295,25.97 C19.2@56.3,25.975
data_13: C31.2 R45.1 R46.2 R47.2 X1.11 | length 51
  Bottom Layer w0.2: X1.11@3.466,33.468 4.452,32.482 5.75,32.482 6.232,32.482
  Bottom Layer w0.3: 6.232,32.482 6.718,32.968 29.282,32.968 32.75,29.5 32.75,13 35,10.75
data_14: C43.2 R64.1 R65.2 R66.2 X1.9 | length 55
  Top Layer w0.4: C43.2@50.543,40.297 R65.2@52.327,40.297 v1(52.327,38.3)
  Bottom Layer w0.2: X1.9@3.466,35.468 4.452,34.482 6.232,34.482 6.25,34.5
  Bottom Layer w0.3: 6.25,34.5 19.92,34.5 20.37,34.05 41.3,34.05 43.5,36.25 50.277,36.25 v1(52.327,38.3)
data_15: C55.2 R83.1 R84.2 R85.2 X1.7 | length 38.2
  Top Layer w0.4: C55.2@34.543,40.297 R84.2@36.327,40.297 v1(36.327,38.3)
  Bottom Layer w0.2: X1.7@3.466,37.468 4.452,36.482 6.268,36.482
  Bottom Layer w0.3: 6.286,36.482 8.561,36.482 9.043,36 25.598,36 26.098,36.5 34.527,36.5 v1(36.327,38.3)
data_16: C67.2 R102.1 R103.2 R104.2 X1.5 | length 22.2
  Top Layer w0.4: C67.2@18.543,40.297 R103.2@20.327,40.297 v1(20.327,38.3)
  Bottom Layer w0.2: X1.5@3.466,39.468 4.452,38.482 6.518,38.482
  Bottom Layer w0.3: 6.518,38.482 7.518,37.482 8.975,37.482 9.457,37 19.027,37 19.253,37.226 v1(20.327,38.3)
data_21: C11.2 R14.1 R15.2 R16.2 X1.16 | length 80.2
  Top Layer w0.3: X1.16@5.466,29.468 5.671,29.263 6.137,29.263 6.502,28.898 6.502,22.998 11.5,18 30.7,18 32.5,16.2 32.5,14.486 35.136,11.85 35.499,11.85 38.499,8.85 67.6,8.85 69.391,10.641 v1(69.391,13.2) v1@69.388,13.203
data_22: C23.2 R33.1 R34.2 R35.2 X1.14 | length 61.9
  Top Layer w0.3: X1.14@5.466,31.468 5.638,31.468 7.6,29.506 7.6,23.7 12.1,19.2 31.1,19.2 33.5,16.8 33.5,14.9 35.55,12.85 35.913,12.85 38.913,9.85 52.1,9.85 53.391,11.141
data_22_dv_analog_interface_ch1: C3.2 C6.2 C10.2 R4.2
data_22_dv_analog_interface_ch2: C15.2 C18.2 C22.2 R23.2
data_22_dv_analog_interface_ch3: C27.2 C30.2 C34.2 R42.2 | length 0
  Bottom Layer w0.3: C27.2@40.295,25.97 C27.2@40.3,25.975
data_22_dv_analog_interface_ch4: C39.2 C42.2 C46.2 R61.2 | length 13.9
  Top Layer w0.3: v1(43,52.7) 43.108,52.7 43.358,52.95 47.831,52.95 v1(48.651,52.13) 48.651,49.853 C42.2@48.648,49.85 C46.2@46.864,49.85
  Bottom Layer w0.3: R61.2@42.99,48.95 42.99,50.4 42.995,50.405 42.995,52.695 v1(43,52.7)